# Altium PCB PCB1.PcbDoc
Units mm, origin at the board's own origin, x right, y up, seen from the top; angles counter-clockwise.
Board outline 34.04 x 34.04 mm, 2 copper layers (Top Layer, Bottom Layer); 40 components, 29 nets, 164 pads, 13 vias.
Unrouted connection lines stored in the file: 2.
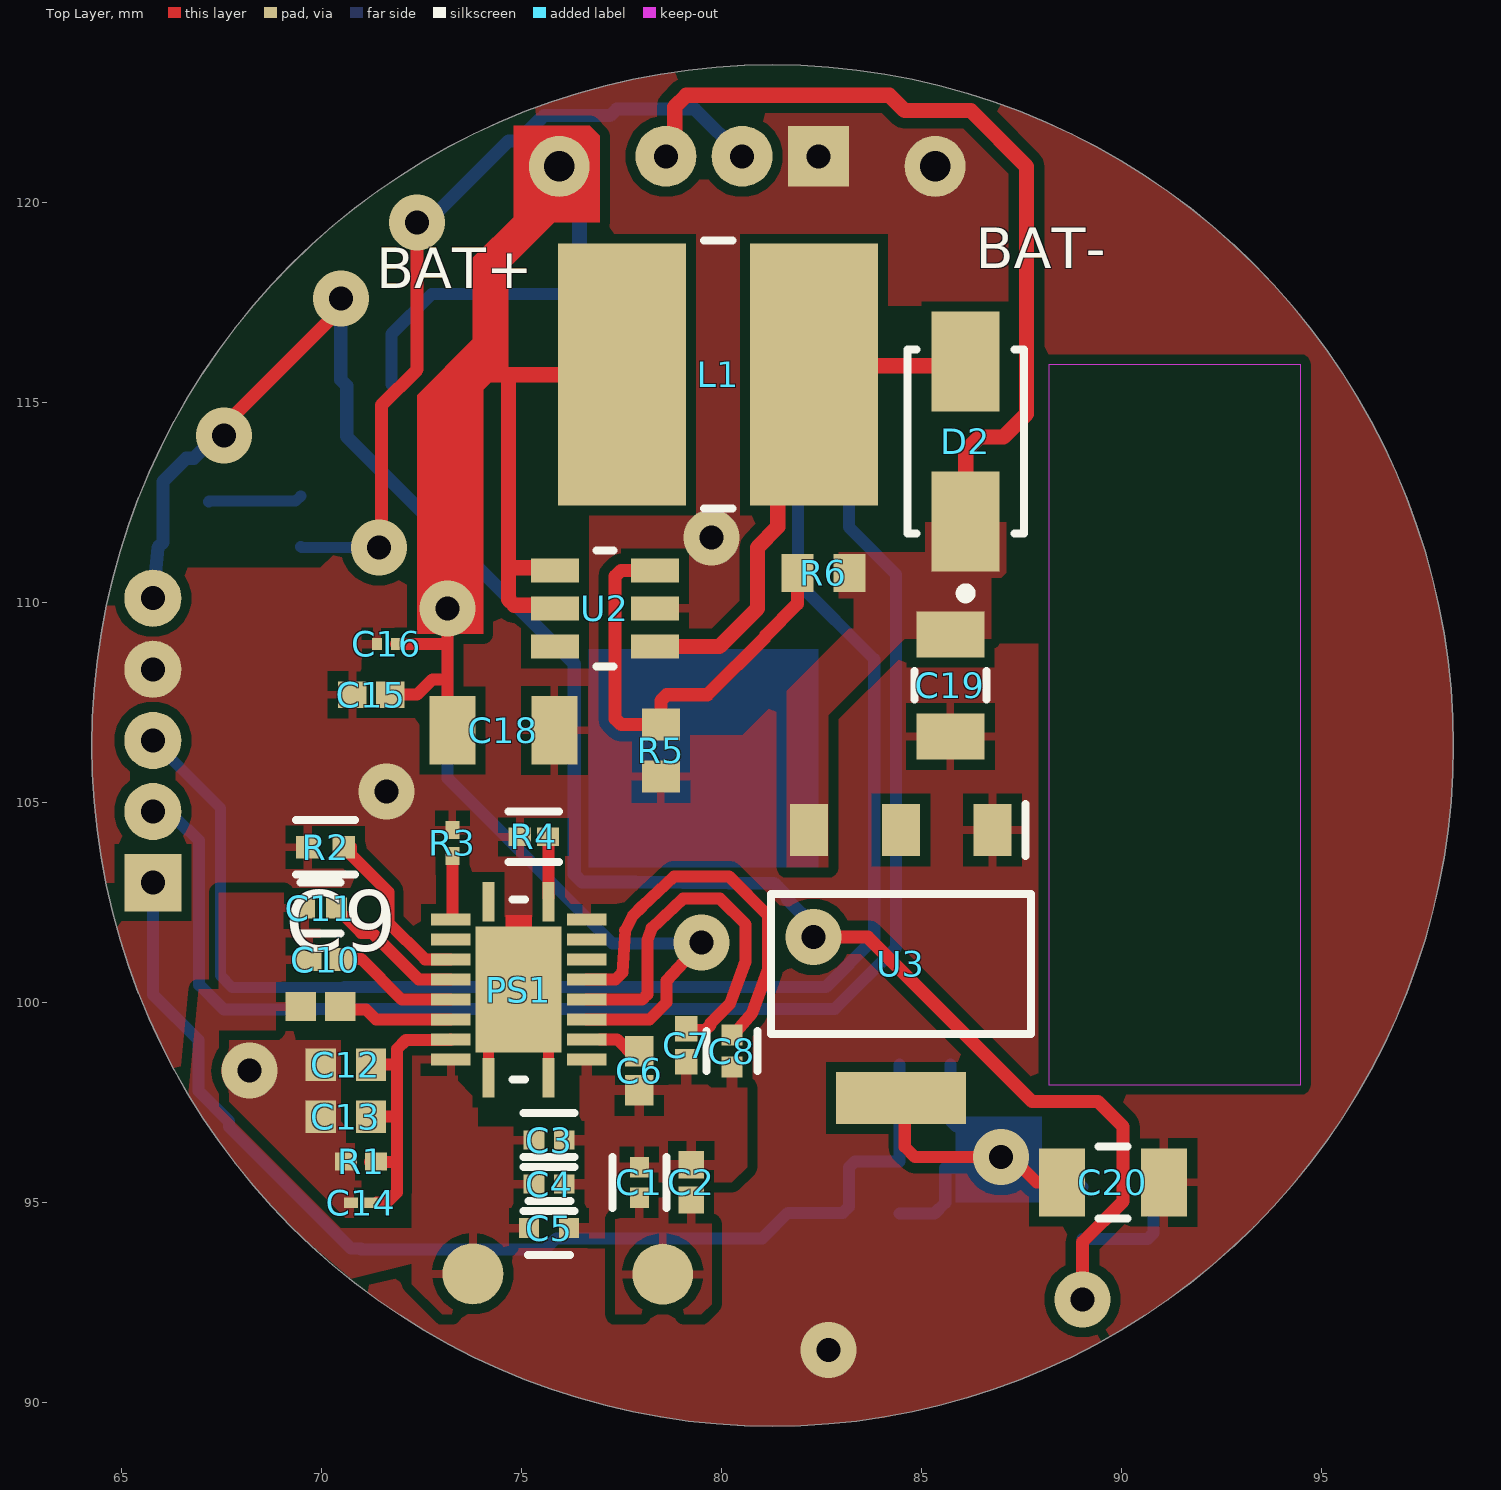
[diagram p0: Top Layer view]
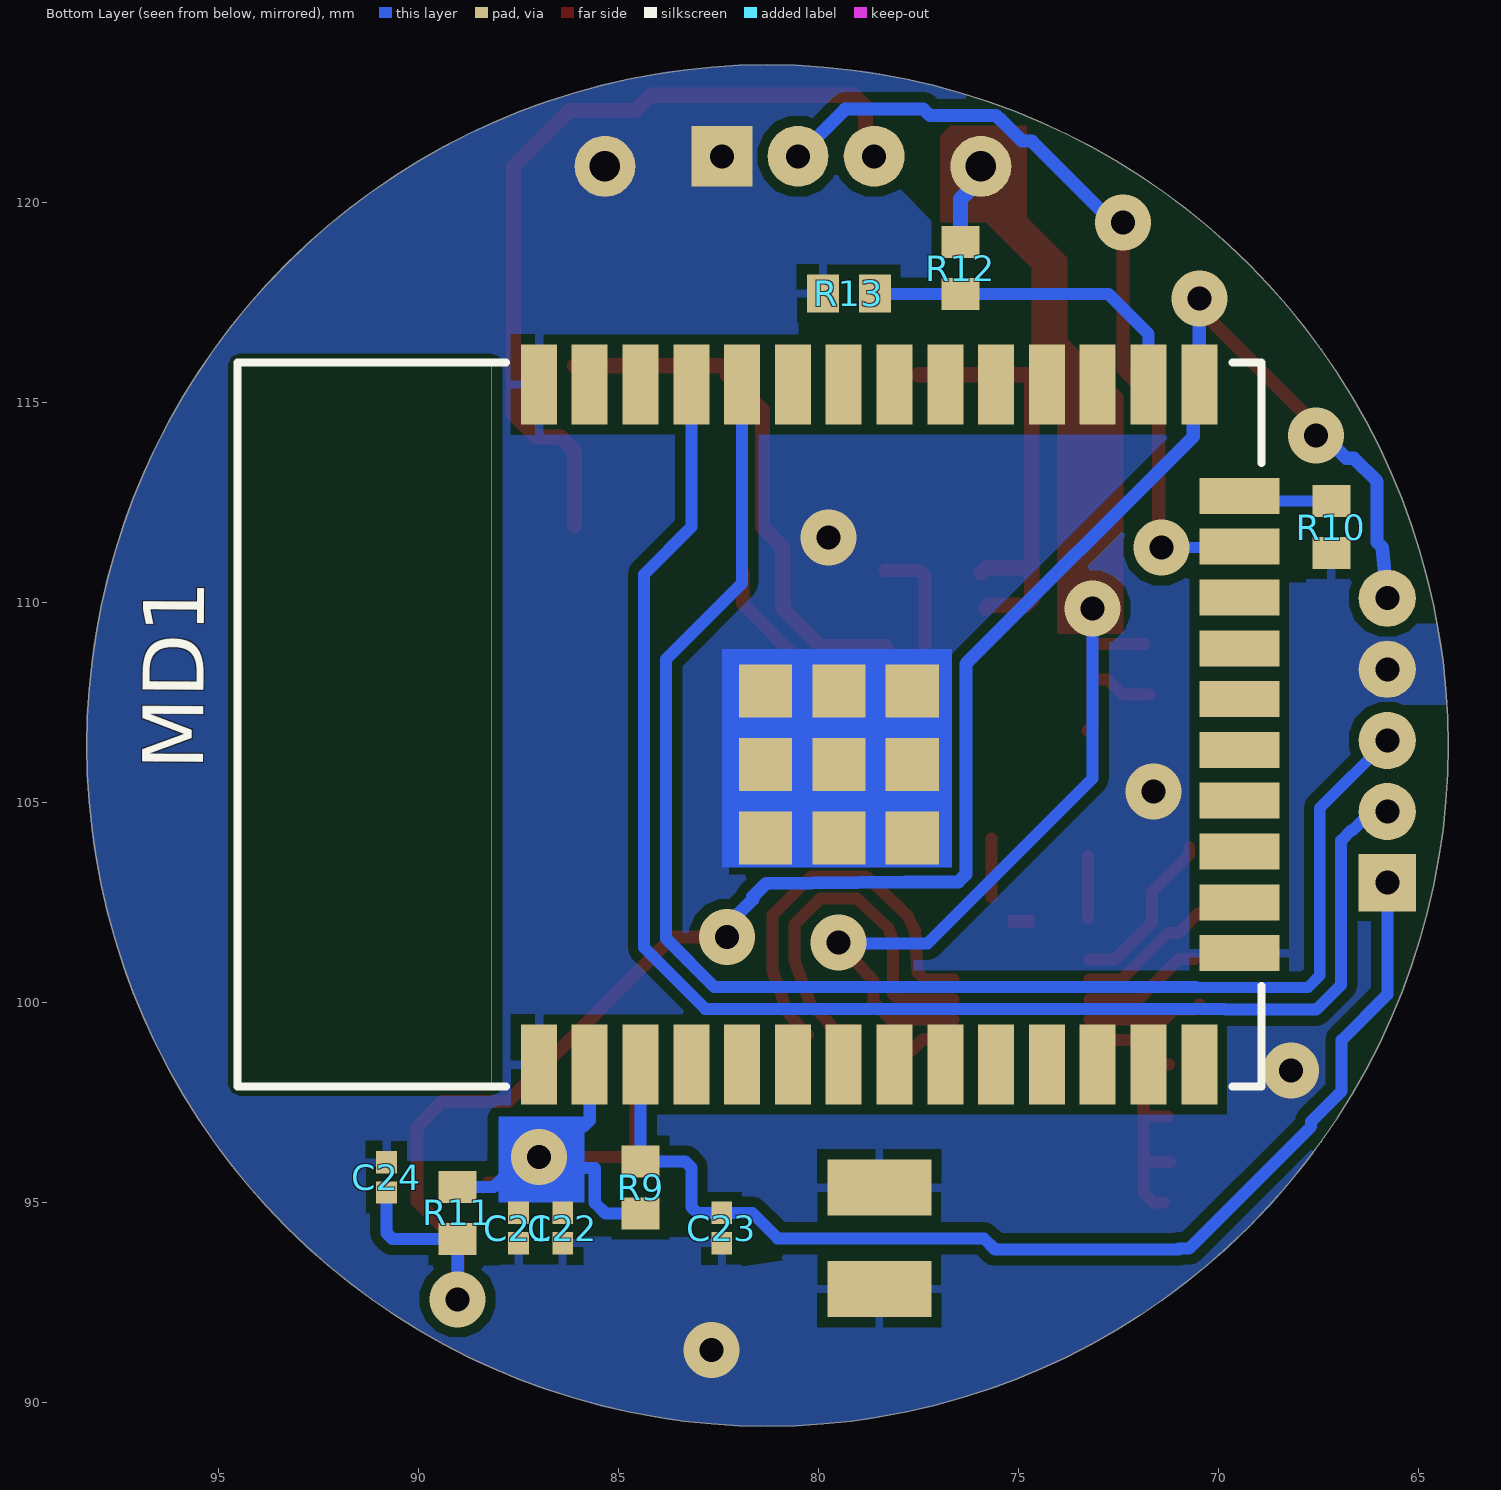
[diagram p1: Bottom Layer view, seen from below]
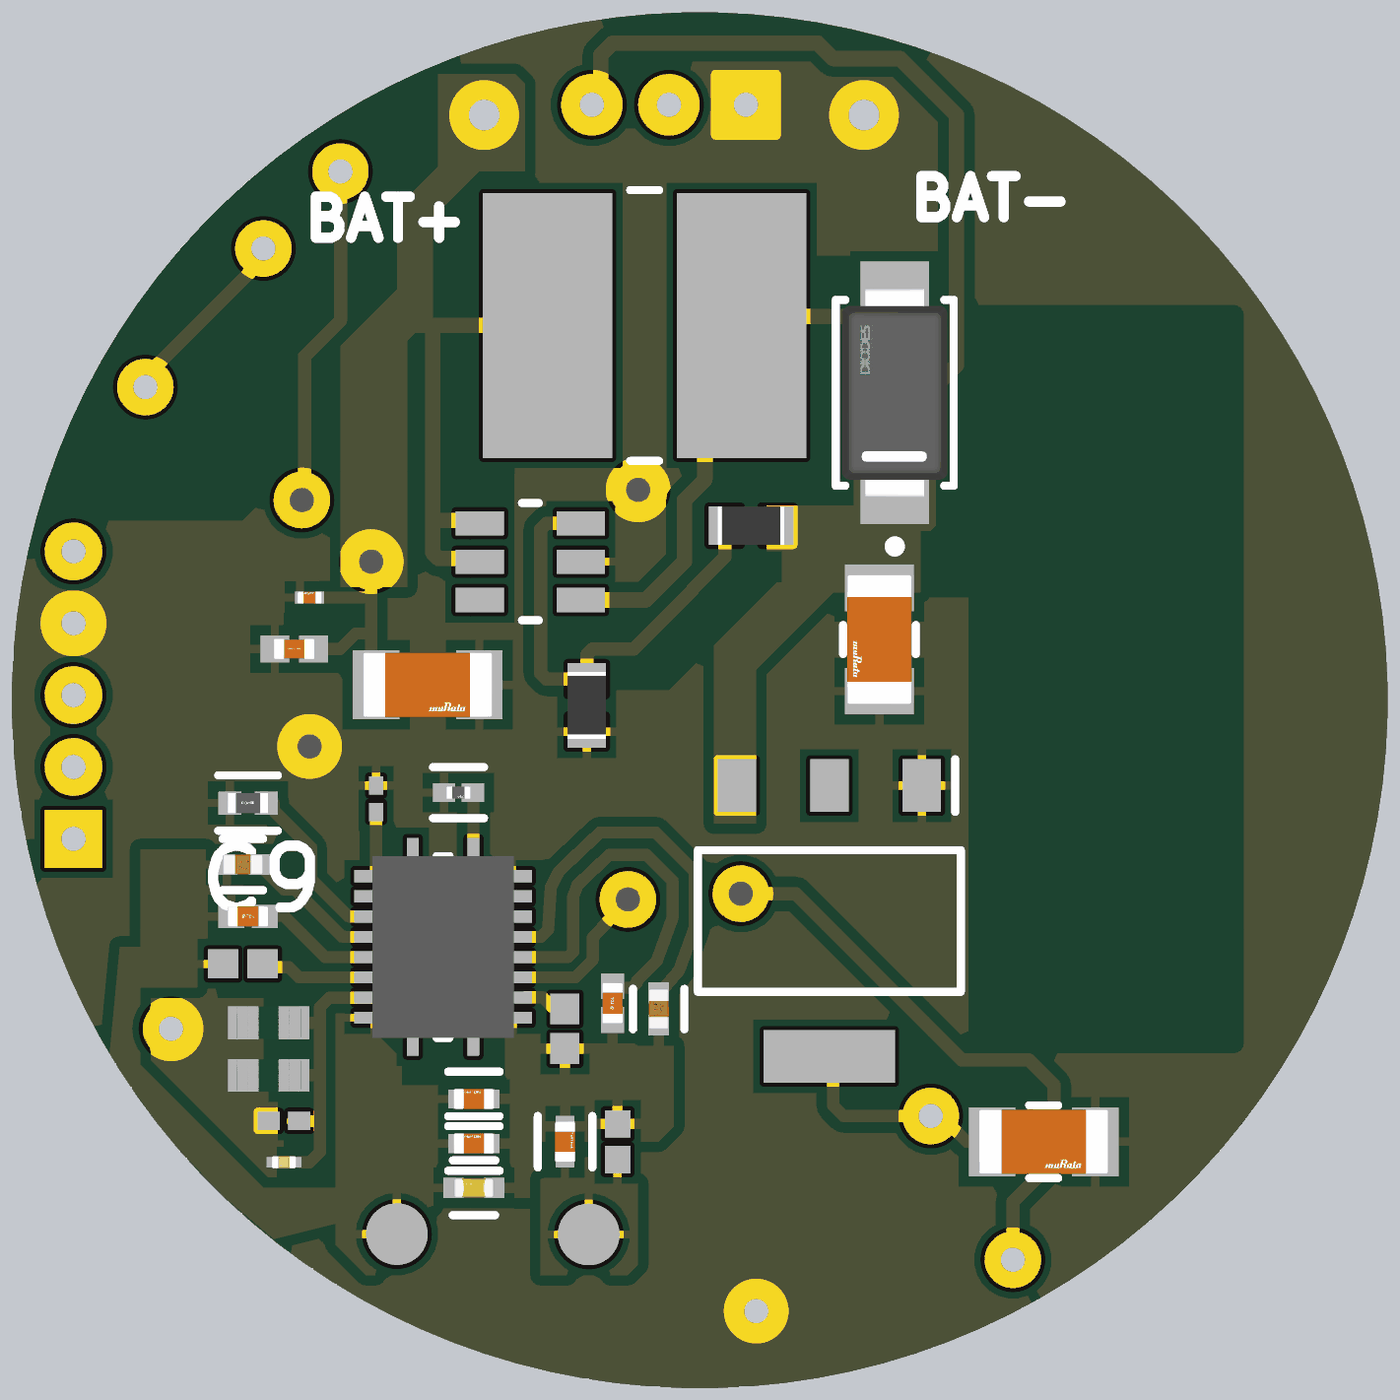
[diagram p2: 3D render of the assembled board from above, using the file's embedded part models]
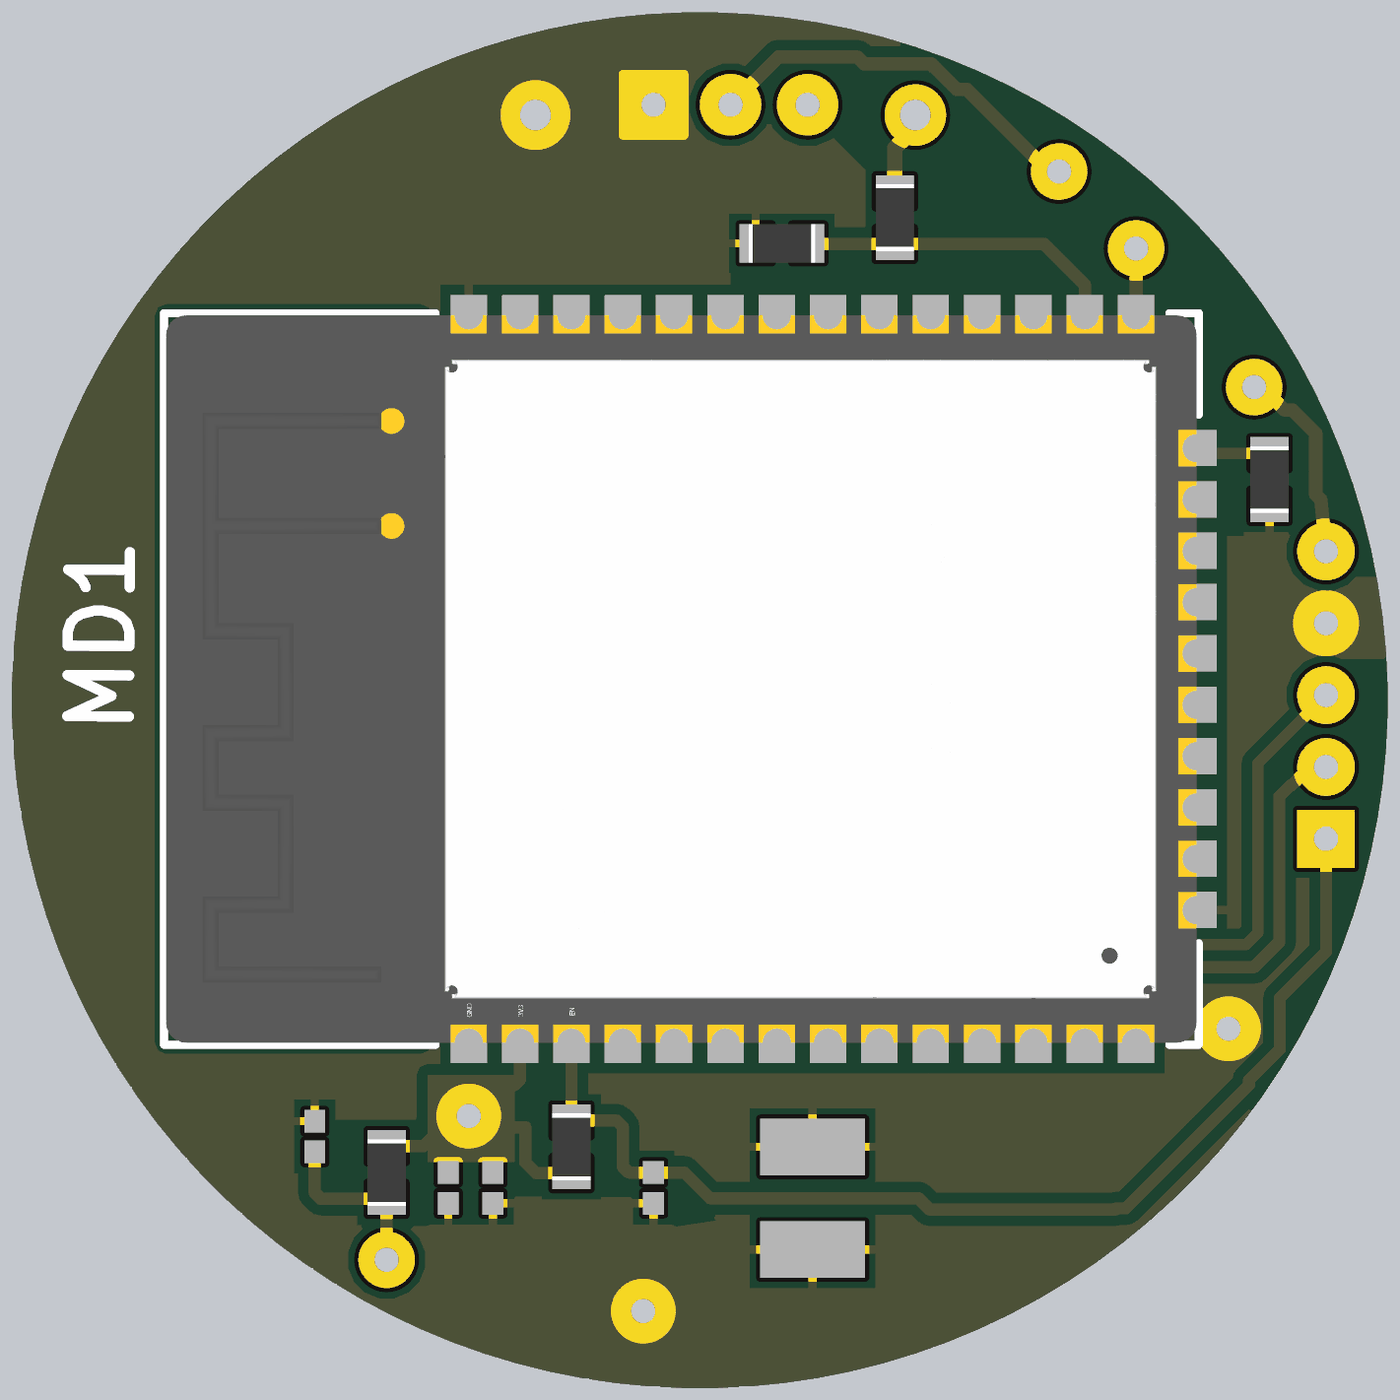
[diagram p3: 3D render of the assembled board from below, using the file's embedded part models]

## Layer stack, top to bottom
Top Solder: solder mask 0.0102, Solder Resist, Dk 3.5
Top Layer: signal copper 0.0356
Dielectric 1: dielectric 0.32, FR-4, Dk 4.8
Bottom Layer: signal copper 0.0356
Bottom Solder: solder mask 0.0102, Solder Resist, Dk 3.5

## Board outline
81.28,89.408 cw(c81.28,106.426) 64.262,106.426 cw(c81.28,106.426) 81.28,123.444 cw(c81.28,106.426) 98.298,106.426 cw(c81.28,106.426)

## Design rules (kind name [scope] priority, off if disabled: settings)
Clearance Clearance_8 [InNamedPolygon('GND_L01_P007')] p1: gap=0.254 ignorepadtopadclearanceinfootprint=FALSE
Clearance Clearance_7 [InNamedPolygon('V_BAT_L01_P006')] p2: gap=0.381 ignorepadtopadclearanceinfootprint=FALSE
Clearance Clearance_6 [InNamedPolygon('GND_L01_P007')] p3: gap=0.381 ignorepadtopadclearanceinfootprint=FALSE
Clearance Clearance_5 [InNamedPolygon('V_BAT_L01_P007')] p4: gap=0.381 ignorepadtopadclearanceinfootprint=FALSE
Clearance Clearance_4 [InNamedPolygon('V_BAT_L01_P006')] p5: gap=0.381 ignorepadtopadclearanceinfootprint=FALSE
Clearance Clearance_3 [All] p6: gap=0.254 ignorepadtopadclearanceinfootprint=TRUE except(0: Arc-Hole Track-Hole SMDPad-Hole THPad-Hole Via-Hole Fill-Hole Poly-Hole Region-Hole Text-Hole)
Clearance Clearance_2 [InNamedPolygon('V_BAT_L01_P006')] p7: gap=0.305 ignorepadtopadclearanceinfootprint=FALSE
Clearance Clearance_1 [InNamedPolygon('GND_BOTTOM')] p8: gap=0.406 ignorepadtopadclearanceinfootprint=FALSE
Clearance [All] p9: gap=0.198 ignorepadtopadclearanceinfootprint=FALSE
ComponentClearance [All] p1: gap=0 collisioncheckmode=3 verticalgap=0 showdistances=FALSE
MinimumSolderMaskSliver [All] p1: minsoldermaskwidth=0.127
PolygonConnect PolygonConnect_26 [All vs IsNamedPolygon('GND_1')] p1: connectstyle=Direct reliefconductorwidth=0.254 reliefentries=4 polygonreliefangle="90 Angle" airgapwidth=0.254
PolygonConnect PolygonConnect_25 [All vs IsNamedPolygon('COIL')] p2: connectstyle=Relief reliefconductorwidth=0.254 reliefentries=4 polygonreliefangle="90 Angle" airgapwidth=0.254
PolygonConnect PolygonConnect_24 [All vs IsNamedPolygon('5V2')] p3: connectstyle=Direct reliefconductorwidth=0.254 reliefentries=4 polygonreliefangle="90 Angle" airgapwidth=0.254
PolygonConnect PolygonConnect_23 [All vs IsNamedPolygon('5V2')] p4: thpad.connectstyle=Direct thpad.reliefconductorwidth=0.254 thpad.reliefentries=4 thpad.polygonreliefangle="90 Angle" thpad.airgapwidth=0.254 smdpad.connectstyle=Relief smdpad.reliefconductorwidth=0.254 smdpad.reliefentries=2 smdpad.polygonreliefangle="90 Angle" smdpad.airgapwidth=0.254 via.connectstyle=Direct via.reliefconductorwidth=0.254 via.reliefentries=4 via.polygonreliefangle="90 Angle" via.airgapwidth=0.254
PolygonConnect PolygonConnect_22 [All vs IsNamedPolygon('GND_1') Or IsNamedPolygon('GND_TOP') Or IsNamedPolygon('GND_BOTTOM')] p5: thpad.connectstyle=Direct thpad.reliefconductorwidth=0.254 thpad.reliefentries=4 thpad.polygonreliefangle="90 Angle" thpad.airgapwidth=0.254 smdpad.connectstyle=Relief smdpad.reliefconductorwidth=0.203 smdpad.reliefentries=4 smdpad.polygonreliefangle="90 Angle" smdpad.airgapwidth=0.254 via.connectstyle=Direct via.reliefconductorwidth=0.254 via.reliefentries=4 via.polygonreliefangle="90 Angle" via.airgapwidth=0.254
PolygonConnect PolygonConnect_21 [All vs IsNamedPolygon('COIL')] p6: thpad.connectstyle=Direct thpad.reliefconductorwidth=0.254 thpad.reliefentries=4 thpad.polygonreliefangle="90 Angle" thpad.airgapwidth=0.254 smdpad.connectstyle=Relief smdpad.reliefconductorwidth=0.203 smdpad.reliefentries=4 smdpad.polygonreliefangle="90 Angle" smdpad.airgapwidth=0.254 via.connectstyle=Direct via.reliefconductorwidth=0.254 via.reliefentries=4 via.polygonreliefangle="90 Angle" via.airgapwidth=0.254
PolygonConnect PolygonConnect_20 [All vs IsNamedPolygon('AC1')] p7: thpad.connectstyle=Direct thpad.reliefconductorwidth=0.254 thpad.reliefentries=4 thpad.polygonreliefangle="90 Angle" thpad.airgapwidth=0.254 smdpad.connectstyle=Relief smdpad.reliefconductorwidth=0.203 smdpad.reliefentries=4 smdpad.polygonreliefangle="90 Angle" smdpad.airgapwidth=0.254 via.connectstyle=Direct via.reliefconductorwidth=0.254 via.reliefentries=4 via.polygonreliefangle="90 Angle" via.airgapwidth=0.254
PolygonConnect PolygonConnect_19 [All vs IsNamedPolygon('AC2')] p8: thpad.connectstyle=Direct thpad.reliefconductorwidth=0.254 thpad.reliefentries=4 thpad.polygonreliefangle="90 Angle" thpad.airgapwidth=0.254 smdpad.connectstyle=Relief smdpad.reliefconductorwidth=0.203 smdpad.reliefentries=4 smdpad.polygonreliefangle="90 Angle" smdpad.airgapwidth=0.254 via.connectstyle=Direct via.reliefconductorwidth=0.254 via.reliefentries=4 via.polygonreliefangle="90 Angle" via.airgapwidth=0.254
PolygonConnect PolygonConnect_18 [All vs IsNamedPolygon('GND_1')] p9: thpad.connectstyle=Direct thpad.reliefconductorwidth=0.254 thpad.reliefentries=4 thpad.polygonreliefangle="90 Angle" thpad.airgapwidth=0.254 smdpad.connectstyle=Relief smdpad.reliefconductorwidth=0.203 smdpad.reliefentries=4 smdpad.polygonreliefangle="90 Angle" smdpad.airgapwidth=0.127 via.connectstyle=Direct via.reliefconductorwidth=0.254 via.reliefentries=4 via.polygonreliefangle="90 Angle" via.airgapwidth=0.254
PolygonConnect PolygonConnect_17 [All vs IsNamedPolygon('AC1.PAD')] p10: connectstyle=Direct reliefconductorwidth=0.254 reliefentries=4 polygonreliefangle="90 Angle" airgapwidth=0.254
PolygonConnect PolygonConnect_16 [All vs IsNamedPolygon('AC1') Or IsNamedPolygon('AC1.PAD') Or IsNamedPolygon('AC2.1') Or IsNamedPolygon('AC2.2')] p11: thpad.connectstyle=Direct thpad.reliefconductorwidth=0.254 thpad.reliefentries=4 thpad.polygonreliefangle="90 Angle" thpad.airgapwidth=0.254 smdpad.connectstyle=Relief smdpad.reliefconductorwidth=0.178 smdpad.reliefentries=2 smdpad.polygonreliefangle="90 Angle" smdpad.airgapwidth=0.254 via.connectstyle=Direct via.reliefconductorwidth=0.254 via.reliefentries=4 via.polygonreliefangle="90 Angle" via.airgapwidth=0.254
PolygonConnect PolygonConnect_15 [All vs IsNamedPolygon('AC1') Or IsNamedPolygon('AC2.1') Or IsNamedPolygon('AC2.2') Or IsNamedPolygon('AC1.PAD')] p12: thpad.connectstyle=Direct thpad.reliefconductorwidth=0.254 thpad.reliefentries=4 thpad.polygonreliefangle="90 Angle" thpad.airgapwidth=0.254 smdpad.connectstyle=Relief smdpad.reliefconductorwidth=0.178 smdpad.reliefentries=4 smdpad.polygonreliefangle="90 Angle" smdpad.airgapwidth=0.254 via.connectstyle=Direct via.reliefconductorwidth=0.254 via.reliefentries=4 via.polygonreliefangle="90 Angle" via.airgapwidth=0.254
PolygonConnect PolygonConnect_14 [All vs IsNamedPolygon('V_BAT_L01_P006')] p13: thpad.connectstyle=Direct thpad.reliefconductorwidth=0.254 thpad.reliefentries=4 thpad.polygonreliefangle="90 Angle" thpad.airgapwidth=0.254 smdpad.connectstyle=Relief smdpad.reliefconductorwidth=0.254 smdpad.reliefentries=4 smdpad.polygonreliefangle="90 Angle" smdpad.airgapwidth=0.254 via.connectstyle=Direct via.reliefconductorwidth=0.254 via.reliefentries=4 via.polygonreliefangle="90 Angle" via.airgapwidth=0.254
PolygonConnect PolygonConnect_13 [All vs IsNamedPolygon('GND_L01_P007')] p14: thpad.connectstyle=Direct thpad.reliefconductorwidth=0.254 thpad.reliefentries=4 thpad.polygonreliefangle="90 Angle" thpad.airgapwidth=0.254 smdpad.connectstyle=Relief smdpad.reliefconductorwidth=0.254 smdpad.reliefentries=4 smdpad.polygonreliefangle="90 Angle" smdpad.airgapwidth=0.254 via.connectstyle=Direct via.reliefconductorwidth=0.254 via.reliefentries=4 via.polygonreliefangle="90 Angle" via.airgapwidth=0.254
PolygonConnect PolygonConnect_12 [All vs IsNamedPolygon('V_BAT_L01_P007')] p15: thpad.connectstyle=Direct thpad.reliefconductorwidth=0.254 thpad.reliefentries=4 thpad.polygonreliefangle="90 Angle" thpad.airgapwidth=0.254 smdpad.connectstyle=Relief smdpad.reliefconductorwidth=0.254 smdpad.reliefentries=4 smdpad.polygonreliefangle="90 Angle" smdpad.airgapwidth=0.254 via.connectstyle=Direct via.reliefconductorwidth=0.254 via.reliefentries=4 via.polygonreliefangle="90 Angle" via.airgapwidth=0.254
PolygonConnect PolygonConnect_11 [All vs IsNamedPolygon('V_BAT_L01_P006')] p16: thpad.connectstyle=Direct thpad.reliefconductorwidth=0.254 thpad.reliefentries=4 thpad.polygonreliefangle="90 Angle" thpad.airgapwidth=0.254 smdpad.connectstyle=Relief smdpad.reliefconductorwidth=0.254 smdpad.reliefentries=4 smdpad.polygonreliefangle="90 Angle" smdpad.airgapwidth=0.254 via.connectstyle=Direct via.reliefconductorwidth=0.254 via.reliefentries=4 via.polygonreliefangle="90 Angle" via.airgapwidth=0.254
PolygonConnect PolygonConnect_10 [All vs IsNamedPolygon('GND_BOTTOM')] p17: thpad.connectstyle=Direct thpad.reliefconductorwidth=0.254 thpad.reliefentries=4 thpad.polygonreliefangle="90 Angle" thpad.airgapwidth=0.254 smdpad.connectstyle=Relief smdpad.reliefconductorwidth=0.305 smdpad.reliefentries=4 smdpad.polygonreliefangle="90 Angle" smdpad.airgapwidth=0.305 via.connectstyle=Direct via.reliefconductorwidth=0.254 via.reliefentries=4 via.polygonreliefangle="90 Angle" via.airgapwidth=0.254
PolygonConnect PolygonConnect_9 [All vs IsNamedPolygon('NONET_L01_P002')] p18: thpad.connectstyle=Direct thpad.reliefconductorwidth=0.254 thpad.reliefentries=4 thpad.polygonreliefangle="90 Angle" thpad.airgapwidth=0.254 smdpad.connectstyle=Relief smdpad.reliefconductorwidth=0.305 smdpad.reliefentries=4 smdpad.polygonreliefangle="90 Angle" smdpad.airgapwidth=0.305 via.connectstyle=Direct via.reliefconductorwidth=0.254 via.reliefentries=4 via.polygonreliefangle="90 Angle" via.airgapwidth=0.254
PolygonConnect PolygonConnect_8 [All vs IsNamedPolygon('V_BAT_L01_P006')] p19: thpad.connectstyle=Direct thpad.reliefconductorwidth=0.254 thpad.reliefentries=4 thpad.polygonreliefangle="90 Angle" thpad.airgapwidth=0.254 smdpad.connectstyle=Relief smdpad.reliefconductorwidth=0.305 smdpad.reliefentries=4 smdpad.polygonreliefangle="90 Angle" smdpad.airgapwidth=0.254 via.connectstyle=Direct via.reliefconductorwidth=0.254 via.reliefentries=4 via.polygonreliefangle="90 Angle" via.airgapwidth=0.254
PolygonConnect PolygonConnect_7 [All vs IsNamedPolygon('V_BAT_L01_P006')] p20: connectstyle=Relief reliefconductorwidth=0.305 reliefentries=4 polygonreliefangle="90 Angle" airgapwidth=0.305
PolygonConnect PolygonConnect_6 [All vs IsNamedPolygon('GND_BOTTOM')] p21: connectstyle=Relief reliefconductorwidth=0.305 reliefentries=4 polygonreliefangle="90 Angle" airgapwidth=0.305
PolygonConnect PolygonConnect_5 [All vs IsNamedPolygon('GND_BOTTOM')] p22: connectstyle=Relief reliefconductorwidth=0.305 reliefentries=4 polygonreliefangle="90 Angle" airgapwidth=0.381
PolygonConnect PolygonConnect_4 [All vs IsNamedPolygon('GND_BOTTOM')] p23: connectstyle=Relief reliefconductorwidth=0.254 reliefentries=4 polygonreliefangle="90 Angle" airgapwidth=0.279
PolygonConnect PolygonConnect_3 [All vs IsNamedPolygon('GND_BOTTOM')] p24: connectstyle=Relief reliefconductorwidth=0.33 reliefentries=4 polygonreliefangle="90 Angle" airgapwidth=0.254
PolygonConnect PolygonConnect_2 [All vs IsNamedPolygon('V_BAT_L01_P006')] p25: connectstyle=Relief reliefconductorwidth=0.381 reliefentries=4 polygonreliefangle="90 Angle" airgapwidth=0.254
PolygonConnect PolygonConnect_1 [All vs IsNamedPolygon('NONET_L01_P002')] p26: connectstyle=Relief reliefconductorwidth=0.33 reliefentries=4 polygonreliefangle="90 Angle" airgapwidth=0.254
PolygonConnect [All] p27: connectstyle=Relief reliefconductorwidth=0.254 reliefentries=4 polygonreliefangle="90 Angle" airgapwidth=0.254
RoutingVias [All] p1: holewidth=0.6 width=1.435 viastyle="Through Hole" minholewidth=0.6 minwidth=1.435 maxholewidth=1.016 maxwidth=1.524
SilkToSilkClearance [All] p1: silktosilkclearance=0.025
SilkToSolderMaskClearance [IsPad] p1: minsilkscreentomaskgap=0.076 clearancetoexposedcopper=FALSE
SolderMaskExpansion [All] p1: expansion=0.102 istentingtop=FALSE
UnConnectedPin [All] p1:
Width [All] p1: maxlimit=0.508 minlimit=0.178 preferedwidth=0.305 minimp=50.000000 maximp=50.000000 favimp=50.000000
26 further rules are at their usual default settings.

## Components (designator, comment, footprint, x,y, rotation, side; value= is the part's Value field where it differs from the comment)
C1 "CL05A474KA5NNNC" FP-CL545-IPC_C 77.948,95.504 r90 top
C2 "04023D104KAT2A" CAPC1005X56X25NL10T15 79.248,95.504 r270 top
C3 "CL05B102JB5NFNC" FP-CL956-IPC_C 75.692,96.562 r180 top
C4 "CL05B102JB5NFNC" FP-CL956-IPC_C 75.692,95.461 r180 top
C5 "CC0402KRX7R7BB472" FP-CC0402-MFG 75.692,94.361 r180 top value="4.7 nF"
C6 "GRM155F51H103ZA01D" CAPC1005X55X25ML05T10 77.946,98.298 r90 top
C7 "C1005X5R1E474K050BB" FP-C1005-050-0_05-IPC_B 79.121,98.933 r90 top
C8 "C0402C223K5RACTU" FP-C0402-BB-MFG 80.264,98.787 r90 top value="22,000 pF"
C9 "GRM155F51H103ZA01D" CAPC1005X55X25ML05T10 69.977,99.901 r0 top
C10 "C1005X5R1E474K050BB" FP-C1005-050-0_05-IPC_B 70.104,101.077 r0 top
C11 "C0402C223K5RACTU" FP-C0402-BB-MFG 69.977,102.362 r0 top value="22,000 pF"
C12 "CL10A106MA8NRNC" FP-CL10-IPC_C 70.612,98.447 r180 top
C13 "CL10A106MA8NRNC" FP-CL10-IPC_C 70.612,97.147 r180 top
C14 "C0603X5R1E104K030BB" FP-C0603-030-0_03-IPC_C 70.993,94.996 r180 top
C15 "EMK105BJ105KV-F" FP-0402-L_1_0_0_05-W_0_5-IPC_A 71.247,107.696 r180 top
C16 "GRM033R60J104KE19J" FP-GRM033-0_03-MFG 71.628,108.966 r180 top
C18 "22uF" FP-GRM31C-0_2-e0_3_0_8-IPC_C 74.549,106.807 r0 top
C19 "22uF" FP-GRM31C-0_2-e0_3_0_8-IPC_C 85.725,107.928 r270 top
C20 "22uF" FP-GRM31C-0_2-e0_3_0_8-IPC_C 89.789,95.504 r0 top
C21 "10uF" CAPC1005X55X30LL05T10 87.503,94.362 r90 bottom
C22 "0.1uF" CAPC1005X55X30LL05T10 86.399,94.361 r90 bottom
C23 "0.1uF" CAPC1005X55X30LL05T10 82.423,94.362 r90 bottom
C24 "0.1uF" CAPC1005X55X30LL05T10 90.805,95.631 r270 bottom
D2 "B340A-13-F" FP-SMA-MFG 86.106,114.032 r90 top
L1 "CDRH6D28NP-3R9NC" INDPM6767X300N 79.917,115.697 r0 top
MD1 "ESP32-WROOM-32" FP-ESP32-WROOM-32-MFG 81.735,106.952 r90 bottom
PS1 "BQ51050BRHLT" RHL(R-PVQFN-N20)_1 74.93,100.322 r90 top
R1 "ERJ-1GNF4122C" RESC0603X26X15ML03T05 70.993,96.021 r0 top
R2 "MCR01MZPF2000" FP-MCR01-IPC_B 70.104,103.883 r0 top
R3 "ERJ-1GEJ391C" RESC0603X26X15NL03T05 73.273,103.99 r270 top
R4 "RMCF0201JT2K40" FP-RMCF0201-IPC_A 75.311,104.14 r0 top
R5 "1k" RESC1609X50X30NL8T20 78.486,106.299 r90 top
R6 "8.2k" RESC1609X50X30NL8T20 82.55,110.744 r0 top
R9 "10K" RESC1609X50X30NL8T20 84.455,95.377 r90 bottom
R10 "3K" RESC1609X50X30NL8T20 67.183,111.887 r270 bottom
R11 "3K" RESC1609X50X30NL8T20 89.027,94.742 r270 bottom
R12 "3k" RESC1609X50X30NL8T20 76.454,118.364 r90 bottom
R13 "8.2k" RESC1609X50X30NL8T20 79.248,117.729 r180 bottom
U2 "MT3608" SOT95P280X145-6N 77.089,109.855 r180 top net-tie
U3 "AMS1117-3.3" SOT229P700X180-4N 84.486,100.965 r270 top

## Footprints (in the part's own frame and the unit in brackets; to place one, negate y for a bottom-side part, rotate by r counter-clockwise, add the part's x,y. Pads: shape width x height; smd on the part's side, far side on the other; paste and mask are expansions set on the pad)
CAPC1005X55X25ML05T10 [mm] "Chip Capacitor, 2-Leads, Body 1.00x0.50mm, IPC Low Density"
  rect 0.76x0.72 smd: 1(-0.49,0) 2(0.49,0)
  body extent -0.53,-0.28 0.53,0.27, height 0.55
CAPC1005X55X30LL05T10 [mm] "Chip Capacitor, 2-Leads, Body 1.00x0.50mm, IPC High Density"
  rect 0.56x0.52 smd: 1(-0.38,0) 2(0.38,0)
  body extent -0.53,-0.28 0.53,0.28, height 0.55
CAPC1005X56X25NL10T15 [mm] "Chip Capacitor, 2-Leads, Body 1.00x0.50mm, IPC Medium Density"
  rect 0.68x0.64 smd: 1(-0.44,0) 2(0.44,0)
  body extent -0.55,-0.3 0.55,0.3, height 0.56
FP-0402-L_1_0_0_05-W_0_5-IPC_A [mm]
  rect 0.715x0.672 smd paste+0 mask+0: 1(-0.479,0) 2(0.479,0)
  body extent -1.04,-0.54 1.04,0.54, height 0.25
FP-C0402-BB-MFG [mm]
  rect 0.52x0.52 smd paste+0 mask+0: 1(-0.4,0) 2(0.4,0)
  silkscreen extent -0.5,-0.64 0.5,0.64, body extent -0.8,-0.4 0.8,0.4, height 0.25
FP-C0603-030-0_03-IPC_C [mm]
  rect 0.356x0.263 smd paste+0 mask+0: 1(-0.253,0) 2(0.253,0)
  body extent -0.53,-0.27 0.53,0.27, height 0.25
FP-C1005-050-0_05-IPC_B [mm]
  rect 0.639x0.572 smd paste+0 mask+0: 1(-0.417,0) 2(0.417,0)
  body extent -0.89,-0.44 0.89,0.44, height 0.25
FP-CC0402-MFG [mm]
  rect 0.5x0.5 smd paste+0 mask+0: 1(-0.5,0) 2(0.5,0)
  silkscreen extent -0.53,-0.68 0.53,0.67, body extent -0.87,-0.48 0.87,0.48, height 0.25
FP-CL10-IPC_C [mm]
  rect 0.758x0.812 smd paste+0 mask+0: 1(-0.627,0) 2(0.627,0)
  body extent -1.11,-0.55 1.11,0.55, height 0.25
FP-CL545-IPC_C [mm]
  rect 0.515x0.472 smd paste+0 mask+0: 1(-0.379,0) 2(0.379,0)
  silkscreen extent -0.64,-0.67 0.64,0.67, body extent -0.74,-0.38 0.74,0.38, height 0.25
FP-CL956-IPC_C [mm]
  rect 0.515x0.472 smd paste+0 mask+0: 1(-0.379,0) 2(0.379,0)
  silkscreen extent -0.64,-0.67 0.64,0.67, body extent -0.74,-0.38 0.74,0.38, height 0.25
FP-ESP32-WROOM-32-MFG [mm]
  rect 2x0.9 smd paste+0 mask+0: 1(-8.5,5.26) 2(-8.5,3.99) 3(-8.5,2.72) 4(-8.5,1.45) 5(-8.5,0.18) 6(-8.5,-1.09) 7(-8.5,-2.36) 8(-8.5,-3.63) 9(-8.5,-4.9) 10(-8.5,-6.17) 11(-8.5,-7.44) 12(-8.5,-8.71) 13(-8.5,-9.98) 14(-8.5,-11.25) 25(8.5,-11.25) 26(8.5,-9.98) 27(8.5,-8.71) 28(8.5,-7.44) 29(8.5,-6.17) 30(8.5,-4.9) 31(8.5,-3.63) 32(8.5,-2.36) 33(8.5,-1.09) 34(8.5,0.18) 35(8.5,1.45) 36(8.5,2.72) 37(8.5,3.99) 38(8.5,5.26)
  rect 0.9x2 smd paste+0 mask+0: 15(-5.715,-12.25) 16(-4.445,-12.25) 17(-3.175,-12.25) 18(-1.905,-12.25) 19(-0.635,-12.25) 20(0.635,-12.25) 21(1.905,-12.25) 22(3.175,-12.25) 23(4.445,-12.25) 24(5.715,-12.25)
  rect 1.33x1.33 smd paste+0 mask+0: 39(-2.835,-4.075) 39(-2.835,-2.24) 39(-2.835,-0.405) 39(-1,-4.075) 39(-1,-2.24) 39(-1,-0.405) 39(0.835,-4.075) 39(0.835,-2.24) 39(0.835,-0.405)
  Keep-Out Layer region: -9,12.75 9,12.75 9,6.45 -9,6.45
  Keep-Out Layer region: -9,12.75 9,12.75 9,6.45 -9,6.45
  silkscreen extent -9.05,-12.8 9.05,12.8, body extent -9,-12.75 9,12.75, height 3.2
FP-GRM31C-0_2-e0_3_0_8-IPC_C [mm]
  rect 1.155x1.706 smd paste+0 mask+0: 1(-1.276,0) 2(1.276,0)
  body extent -1.95,-1 1.95,1, height 0.25
FP-GRM033-0_03-MFG [mm]
  rect 0.25x0.3 smd paste+0 mask+0: 1(-0.237,0) 2(0.237,0)
  body extent -0.46,-0.27 0.46,0.27, height 0.25
FP-MCR01-IPC_B [mm]
  rect 0.566x0.572 smd paste+0 mask+0: 1(-0.453,0) 2(0.453,0)
  silkscreen extent -0.74,-0.69 0.74,0.69, body extent -0.89,-0.44 0.89,0.44, height 0.25
FP-RMCF0201-IPC_A [mm]
  rect 0.554x0.463 smd paste+0 mask+0: 1(-0.354,0) 2(0.354,0)
  silkscreen extent -0.63,-0.63 0.63,0.63, body extent -0.83,-0.43 0.83,0.43, height 0.25
FP-SMA-MFG [mm]
  rect 2.5x1.7 smd paste+0 mask+0: 1(-2,0) 2(2,0)
  silkscreen extent -3.92,-1.46 2.3,1.46, body extent -3.35,-1.56 3.35,1.56, height 0.25
INDPM6767X300N [mm]
  rect 3.2x6.55 smd: 1(-2.4,0) 2(2.4,0)
  silkscreen extent -0.36,-3.35 0.36,3.35
RESC0603X26X15ML03T05 [mm] "Chip Resistor, 2-Leads, Body 0.60x0.30mm, IPC Low Density"
  rect 0.55x0.45 smd: 1(-0.375,0) 2(0.375,0)
  body extent -0.32,-0.16 0.32,0.17, height 0.26
RESC0603X26X15NL03T05 [mm] "Chip Resistor, 2-Leads, Body 0.60x0.30mm, IPC Medium Density"
  rect 0.45x0.35 smd: 1(-0.325,0) 2(0.325,0)
  body extent -0.32,-0.16 0.32,0.17, height 0.26
RESC1609X50X30NL8T20 [mm] "Chip Resistor, 2-Leads, Body 1.65x0.95mm, IPC Medium Density"
  rect 0.8x0.95 smd: 1(-0.65,0) 2(0.65,0)
  body extent -0.82,-0.48 0.82,0.48, height 0.5
RHL(R-PVQFN-N20)_1 [mm]
  rect 0.99x0.3 smd: 1(-2.2,-0.75) 10(2.2,-0.75) 11(2.2,0.75) 20(-2.2,0.75)
  rect 0.3x0.99 smd: 2(-1.75,-1.7) 3(-1.25,-1.7) 4(-0.75,-1.7) 5(-0.25,-1.7) 6(0.25,-1.7) 7(0.75,-1.7) 8(1.25,-1.7) 9(1.75,-1.7) 12(1.75,1.7) 13(1.25,1.7) 14(0.75,1.7) 15(0.25,1.7) 16(-0.25,1.7) 17(-0.75,1.7) 18(-1.25,1.7) 19(-1.75,1.7)
  rect 3.15x2.15 smd: 21(0,0)
  silkscreen extent -2.25,-0.16 2.25,0.16, body extent -2.25,-1.75 2.25,1.75, height 1
SOT95P280X145-6N [mm]
  rect 1.2x0.6 smd: 1(-1.25,0.95) 2(-1.25,0) 3(-1.25,-0.95) 4(1.25,-0.95) 5(1.25,0) 6(1.25,0.95)
  silkscreen extent -0.21,-1.45 0.21,1.45
SOT229P700X180-4N [mm]
  rect 1.3x0.95 smd: 1(-3.35,2.29) 2(-3.35,0) 3(-3.35,-2.29)
  rect 1.3x3.25 smd mask+0.102: 4(3.35,0)
  silkscreen extent -4,-3.25 1.75,3.25

## Part data
C1: library part CMP-13271-002157-1, "Cap Ceramic 470nF 25V X5R ±10% SMD 0402 +85°C Paper T/R", Capacitance=470nF, Case Code (Imperial)=0402, Case Code (Metric)=1005, Max Operating Temperature=85°C, Min Operating Temperature=-55°C, Package Quantity=1, Tolerance=10%, Voltage Rating=25V, Case/Package=0402, Lead Free="Lead Free", Length=0.039inch, Material=Ceramic, Mount="Surface Mount", Packaging="Tape and Reel", Thickness=0.022inch, Voltage Rating (DC)=25V, Width=0.02inch
C2: library part CMP-1034-02072-2, Manufacturer="AVX Interconnect / Elco", Part Number=04023D104KAT2A
C3 C4: library part CMP-13271-003618-1, "Cap Ceramic 1nF 50V X7R ±5% SMD 0402 +125°C Paper T/R", Capacitance=1nF, Case Code (Imperial)=0402, Case Code (Metric)=1005, Max Operating Temperature=125°C, Min Operating Temperature=-55°C, Package Quantity=1, Tolerance=5%, Voltage Rating=50V, Case/Package=0402, Length=0.039inch, Mount="Surface Mount", Packaging="Tape and Reel", Thickness=0.022inch, Width=0.02inch
C5: library part CMP-1034-01810-2, "CAP CER 4700PF 16V X7R 0402", Capacitance="4.7 nF", Manufacturer=YAGEO, Package=CC0402, Temperature="-55°C to +125°C", Temperature Characteristic=X7R, Temperature Coefficient=30ppm/°C, Temperature Range High=+125°C, Temperature Range Low=-55°C, Tolerance=0.1, Voltage Rating="16 V", Automotive=No, Automotive Grade=NA, Category=Cap, ComponentLink2Description=Datasheet, ComponentLink2URL=http://www.yageo.com/documents/recent/UPY-GP_NP0_16V-to-50V_16.pdf, Device Class L1="Passive Components", Device Class L2=Capacitors, Device Class L3="Ceramic Capacitors", Digikey Description="CAP CER 4700PF 16V X7R 0402", Footprint Url=http://www.yageo.com/exep/pages/download/literatures/UPY-C_GEN_24.pdf, Height=0.55mm, Ipc Land Pattern Name=CAPC10050X50, Lead Free=Yes, Manufacturer Part Number=CC0402KRX7R7BB472, Material=Ceramic, Mouser Description="YAGEO (PHYCOMP) - CC0402KRX7R7BB472 - CAP, MLCC, X7R, 4.7NF, 16V, 0402", Octopart=https://octopart.com/cc0402krx7r7bb472-yageo-44648962, RoHS=TRUE
C6: library part CMP-2008-04529-1, "10n", Manufacturer=Murata, Part Number=GRM155F51H103ZA01D
C7 C10: library part CMP-2000-06003-2, "Multilayer Ceramic Capacitors 470nF ±10% 25V X5R SMD 0402", Capacitance=470nF, Case Code (Imperial)=0402, Case Code (Metric)=1005, Dielectric=X5R, Dielectric Material=Ceramic, Max Operating Temperature=85°C, Min Operating Temperature=-55°C, Package Quantity=10000, Tolerance=10%, Voltage=25V, Case/Package=0402, Construction=Flat, Depth=0.5mm, Dissipation Factor=10%, Height=0.5mm, Lead Free="Lead Free", Length=1mm, Mount="Surface Mount", Packaging="Tape and Reel", Radiation Hardening=No, REACH SVHC="No SVHC", Resistor Type=Ceramic, RoHS Compliant=Yes, Series=C, Termination=SMD/SMT, Thickness=500um, Voltage Rating=25V, Voltage Rating (DC)=25V, Weight=2.3E-05oz, Width=0.02inch
C8 C11: library part CMP-2008-03151-2, "CAP CER 0.022UF 50V 10% X7R 0402", Capacitance="22,000 pF", Manufacturer=Kemet, Package=C0402-BB, Temperature="-55°C to +125°C", Temperature Characteristic=X7R, Temperature Coefficient=15%, Temperature Range High=+125°C, Temperature Range Low=-55°C, Tolerance=0.1, Voltage Rating="50 V", Automotive=No, Category=Cap, ComponentLink2Description=Datasheet, ComponentLink2URL=https://content.kemet.com/datasheets/KEM_C1002_X7R_SMD.pdf, Device Class L1="Passive Components", Device Class L2=Capacitors, Device Class L3="Ceramic Capacitors", Digikey Description="CAP CER 0.022UF 50V 10% X7R 0402", Height=0.55mm, Ipc Land Pattern Name=CAPC10050X50, Lead Free=Yes, Manufacturer Part Number=C0402C223K5RACTU, Material=Ceramic, Mouser Description="0402 C 22nF Ceramic Multilayer Capacitor, 50 V, +125degC, X7R Dielectric, +/-10%", Octopart=https://octopart.com/c0402c223k5ractu-kemet-99241, RoHS=TRUE
C9: library part CMP-2008-04529-1, Manufacturer=Murata, Part Number=GRM155F51H103ZA01D
C12 C13: library part CMP-13271-004224-1, "Cap Ceramic 10uF 25V X5R ±20% Pad SMD 0603 +85°C T/R", Capacitance=10uF, Case Code (Imperial)=0603, Case Code (Metric)=1608, Dielectric=X5R, Max Operating Temperature=85°C, Min Operating Temperature=-55°C, Package Quantity=1, Tolerance=20%, Voltage Rating=25V, Case/Package=0603, Contact Plating=Tin, Lead Free="Lead Free", Length=0.063inch, Mount="Surface Mount", Packaging="Tape and Reel", Termination=Wraparound, Thickness=0.035inch, Width=0.031inch
C14: library part CMP-08246-005139-1, "Multilayer Ceramic Capacitors 100nF ±10% 25V X5R SMD 0201", Capacitance=100nF, Case Code (Imperial)=0201, Case Code (Metric)=0603, Dielectric=X5R, Dielectric Material=Ceramic, Max Operating Temperature=85°C, Min Operating Temperature=-55°C, Package Quantity=15000, Tolerance=10%, Voltage Rating=25V, Case/Package=0201, Depth=0.3mm, Height=0.3mm, Lead Free="Lead Free", Length=0.6mm, Mount="Surface Mount", Packaging="Tape and Reel", REACH SVHC="No SVHC", RoHS Compliant=Yes, Series=C, Termination=SMD/SMT, Thickness=0.013inch, Voltage Rating (DC)=25V, Weight=6E-06oz, Width=0.012inch
C15: library part CMP-14477-000104-2, "1u", Capacitance=1uF, Case Code (Imperial)=0402, Case Code (Metric)=1005, Dielectric=X5R, Max Operating Temperature=85°C, Min Operating Temperature=-55°C, Package Quantity=1, Tolerance=10%, Voltage Rating=16V, Case/Package=0402, Construction=Flat, Depth=0.5mm, Halogen Free="Halogen Free", Height=0.5mm, Length=1mm, Mount="Surface Mount", Number of Pins=2, Packaging="Tape and Reel", Radiation Hardening=No, RoHS Compliant=Yes, Series=M, Termination=SMD/SMT, Thickness=0.022inch, Voltage Rating (DC)=16V, Width=0.02inch
C16: library part CMP-2010-01258-2, "Chip Multilayer Ceramic Capacitors for General Purpose, 0201, 0.10uF, X5R, 15%, 10%, 6.3V", Capacitance=100nF, Case Code (Imperial)=0201, Case Code (Metric)=0603, Dielectric=X5R, Max Operating Temperature=85°C, Min Operating Temperature=-55°C, Package Quantity=50000, Tolerance=10%, Voltage Rating=6.3V, Case/Package=0201, Depth=0.3mm, Height=0.3mm, Lead Free="Lead Free", Length=0.6mm, Mount="Surface Mount", Packaging="Tape and Reel", Radiation Hardening=No, Termination=SMD/SMT, Thickness=0.013inch, Voltage Rating (DC)=6.3V, Width=0.012inch
C18 C19 C20: library part CMP-06035-036836-1, "Chip Multilayer Ceramic Capacitors for General Purpose, 1206, 22uF, X7R, 15%, 10%, 10V", Case Code (Imperial)=1206, Case Code (Metric)=3216, Dielectric=X7R, Max Operating Temperature=125°C, Min Operating Temperature=-55°C, Package Quantity=6000, Resistor Type=Ceramic, Tolerance=10%, Voltage Rating=10V, Capacitance=22uF, Case/Package=1206, Height=1.6mm, Length=0.126inch, Mount="Surface Mount", Packaging="Tape and Reel", Termination=SMD/SMT, Thickness=0.071inch, Voltage Rating (DC)=10V, Weight=0.001411oz, Width=1.6mm
C21 C22 C23 C24: library part CMP-0001-00074-2, Manufacturer=Kemet, Part Number=C0402C104K4RACTU
D2: library part CMP-1667-00003-3, "DIODE SCHOTTKY 40V 3A SMA", Average Rectified Current=3A, Capacitance=250pF, Case/Package=SMA, Forward Voltage=500mV, Max Forward Surge Current (Ifsm)=80A, Max Operating Temperature=125°C, Max Repetitive Reverse Voltage (Vrrm)=40V, Max Reverse Current=500uA, Min Operating Temperature=-55°C, Package Quantity=5000, Contact Plating=Tin, Current=3A, Current Rating=3A, Element Configuration=Single, Forward Current=3A, Height=2.3mm, Lead Free="Lead Free", Length=4.6mm, Max Reverse Voltage (DC)=40V, Mount="Surface Mount", Number of Pins=2, Output Current=3A, Packaging="Tape and Reel", Peak Non-Repetitive Surge Current=80A, Polarity=Standard, Radiation Hardening=No, REACH SVHC="No SVHC", RoHS Compliant=Yes, Series=-, Termination=SMD/SMT, Voltage=40V, Voltage Rating (DC)=40V, Weight=0.002258oz, Width=2.92mm
L1: "Inductor Power Shielded Drum Core 3.9uH 30% 100KHz Ferrite 2.6A 27mOhm DCR T/R", Manufacturer_Name=Sumida, Mouser Part Number=851-CDRH6D28NP-3R9NC, Arrow Part Number=CDRH6D28NP-3R9NC, Arrow Price/Stock=https://www.arrow.com/en/products/cdrh6d28np-3r9nc/sumida?region=nac, Datasheet Link=https://products.sumida.com/products/pdf/CDRH6D28.pdf, Geometry.Height=3mm, Manufacturer_Part_Number=CDRH6D28NP-3R9NC, Mouser Price/Stock=https://www.mouser.co.uk/ProductDetail/Sumida/CDRH6D28NP-3R9NC?qs=zomZ4Ds8yq0PwwlLtueMZw%3D%3D
MD1: library part CMP-194065-000008-1, "RX TXRX MOD WIFI SURFACE MOUNT", Case/Package=SMD/SMT, Frequency=2.5GHz, Max Operating Temperature=85°C, Min Operating Temperature=-40°C, Operating Supply Voltage=3.6V, Package Quantity=550, Data Rate=150Mbps, Mount="Surface Mount", Packaging="Cut Tape", Sensitivity=-98dBm, Weight=0.088185oz
PS1: "Power Supply", Manufacturer_Name="Texas Instruments", Mouser Part Number=595-BQ51050BRHLT, Arrow Part Number=BQ51050BRHLT, Arrow Price/Stock=https://www.arrow.com/en/products/bq51050brhlt/texas-instruments?region=nac, Datasheet Link=http://www.ti.com/lit/ds/symlink/bq51050b.pdf, Manufacturer_Part_Number=BQ51050BRHLT, Mouser Price/Stock=https://www.mouser.co.uk/ProductDetail/Texas-Instruments/BQ51050BRHLT?qs=E2%2FxqS9xjzqwEGLvRoYWQw%3D%3D
R1: library part CMP-2004-03348-1, Manufacturer=Panasonic, Part Number=ERJ-1GNF4122C
R2: library part CMP-08839-015346-1, "Thick Film Chip Resistor, 0402, 200Ω, 1%, 100ppm/°C, 0.063W, 50V", Case/Package=Molded, Max Operating Temperature=155°C, Min Operating Temperature=-55°C, Power Rating=63mW, Resistance=200R, Resistor Type="Thick Film", Temperature Coefficient=100ppm/°C, Tolerance=1%, Voltage Rating (DC)=50V, Construction=Rectangular, Contact Plating=Tin, Depth=0.5mm, Lead Free="Lead Free", Length=1mm, Military Standard=Not, Mount="Surface Mount", Packaging="Tape and Reel", RoHS Compliant=Yes, Size Code=0402
R3: library part CMP-2004-03181-1, Manufacturer=Panasonic, Part Number=ERJ-1GEJ391C
R4: library part CMP-26527-004736-1, "2.4kΩ ±5% 0.05W 0201 Thick Film Chip Resistor AEC-Q200 compliant", Case Code (Imperial)=0201, Case Code (Metric)=0603, Max Operating Temperature=125°C, Max Power Dissipation=50mW, Min Operating Temperature=-55°C, Resistance=2.4kR, Resistor Type="Thick Film", Temperature Coefficient=200ppm/°C, Tolerance=5%, Case/Package=0201, Contact Plating=Tin, Height=0.009inch, Length=0.024inch, Mount="Surface Mount", Number of Terminations=2, Packaging="Tape and Reel", Radiation Hardening=No, RoHS Compliant=Yes, Series=RMCF, Width=0.012inch
R5 R6 R9 R10 R11 R12 R13: library part CMP-2000-03816-5, "Chip Resistor, 0 Ohm, Jumper, 100 mW, -55 to 155 degC, 0603 (1608 Metric), RoHS, Tape and Reel", Manufacturer="Vishay Semiconductor", Max Operating Temperature="155 degC", Min Operating Temperature="-55 degC", Package Quantity=5000, Voltage Rating="75 V", ComponentLink1Description="Manufacturer URL", ComponentLink1URL=http://www.vishay.com/, ComponentLink2Description=Datasheet, ComponentLink2URL=http://www.vishay.com/docs/20035/dcrcwe3.pdf, DatasheetVersion=06/2012, Height="0.45 mm", Length="1.55 mm", Mount="Surface Mount", Mounting Technology="Surface Mount", PackageDescription="2-Pin Surface Mount Device, Body 1.575 x 0.85 mm", PackageReference=0603, Packaging="Tape and Reel", Pins=2, REACH SVHC=Unknown, RoHSCompliant=true
U2: "High Efficiency 1.2MHz 2A Step Up Converter", Manufacturer_Name=Aerosemi, Datasheet Link=https://www.olimex.com/Products/Breadboarding/BB-PWR-3608/resources/MT3608.pdf, Geometry.Height=1.45mm, Manufacturer_Part_Number=MT3608
U3: "1A LOW DROPOUT VOLTAGE REGULATOR, SOT-223", Manufacturer_Name="Advanced Monolithic Systems", Datasheet Link=http://www.advanced-monolithic.com/pdf/ds1117.pdf, Geometry.Height=1.8mm, Manufacturer_Part_Number=AMS1117-3.3

## Free pads (board coordinates)
  round 1.524 hole 0.6: 14(78.613,121.158) 14(80.518,121.158)
  rect 1.524x1.524 hole 0.6: 14(82.423,121.158)
  rect 1.43x1.43 hole 0.6: 18(65.786,102.997)
  round 1.43 hole 0.6: 19(65.786,104.775) 20(65.786,106.553) 21(65.786,108.331) 21(65.786,110.109)
  round 1.524 smd: 22(78.533,93.209) 23(73.787,93.218)
  round 1.524 hole 0.762: 25(75.946,120.904) 26(85.344,120.904)
  rect 2.6x1.4 smd far side: 27(78.486,92.837) 28(78.486,95.377)

## Via types
v1: diameter 1.4, hole 0.6, Top Layer to Bottom Layer, 13 vias

## Nets (pads, with @x,y where several pads share a name; then routed paths per layer and width w, separated by ;. In a path a pad name is that pad's centre, name@x,y a point inside that pad or via, vN(x,y) a via of type N, cw(c..) or ccw(c..) an arc to the next point about the centre after c; other vN are vias at no path point)
3V3: C20.1 C21.2 C22.2 MD1.2 R9.1 R11.1 U3.4 | length 12.9
  Top Layer w0.305: U3.4@84.582,97.409 84.582,96.393 84.836,96.139 v1(86.995,96.139) 87.249,96.139 87.884,95.504 88.265,95.504 C20.1@88.392,95.377
  Bottom Layer w0.305: R9.1 85.329,94.727 85.598,94.996 85.598,95.863 v1@86.465,95.863 ; MD1.2 85.725,97.05 85.874,96.901 86.36,96.901 86.487,96.774 86.487,96.52 86.868,96.139 v1(86.995,96.139) ; 86.36,95.758 86.399,95.719 ; 87.757,95.758 88.123,95.392 R11.1
5V2: C19.1 D2.1 pad.14@78.613,121.158 R6.2 U3.3 | length 20.8
  Top Layer w0.381: pad.14@78.613,121.285 78.832,121.504 78.832,122.393 79.121,122.682 84.201,122.682 84.582,122.301 86.233,122.301 87.63,120.904 87.63,114.714 87.054,114.138 86.452,114.138 86.106,113.792 D2.1@86.106,111.919
AC1: C1.2 C2.1 C3.1 C4.1 C5.1 C6.1 C7.1 C8.1 PS1.2
AC2: C3.2 C4.2 C5.2 C9.1 C10.1 C11.1 pad.23 PS1.19
BAT: C15.1 C16.1 C18.1 L1.1 pad.25 PS1.4 R12.2 U2.4 U2.5 | length 36.2
  Top Layer w0.3: C15.1 72.39,107.696 72.771,108.077 73.152,108.077 ; C16.1 73.152,108.966 ; v1(73.152,109.855) 73.152,108.966 ; C18.1@73.279,106.807 73.152,106.934 73.152,108.077 ; PS1.4 78.199,99.572 78.632,100.006 78.632,100.447 78.632,100.548 v1(79.502,101.498) ; 73.152,108.077 73.152,108.966
  Top Layer w0.381: 74.041,115.697 74.676,115.697 ; U2.5@75.819,109.855 75.74,109.934 74.821,109.934 74.676,110.078 74.676,110.871 ; U2.4@75.946,110.744 75.819,110.871 74.676,110.871 ; L1.1 74.676,115.697 ; 74.676,110.871 74.676,115.697
  Bottom Layer w0.3: v1(73.152,109.855) 73.152,105.604 77.283,101.473 79.477,101.473 v1(79.502,101.498)
  Bottom Layer w0.381: pad.25 75.946,120.595 76.454,120.087 R12.2 R12.2@76.454,118.872
BOOT1: C6.2 PS1.3 | length 1.2
  Top Layer w0.3: PS1.3@76.962,99.079 77.392,99.079 77.655,98.817 C6.2@78.021,98.817
BOOT2: C9.2 PS1.17 | length 2.9
  Top Layer w0.3: C9.2@70.485,99.949 70.612,99.822 71.12,99.822 71.37,99.572 PS1.17
CLAMP1: C7.2 PS1.5 | length 9.6
  Top Layer w0.3: PS1.5 78.016,100.072 78.15,100.205 78.15,101.567 78.256,101.859 79.045,102.602 79.959,102.602 80.606,101.955 80.606,101.041 80.216,99.973 79.727,99.485 79.727,99.441 79.6,99.314 C7.2@79.121,99.314
CLAMP2: C10.2 PS1.16 | length 3
  Top Layer w0.3: C10.2@70.612,101.092 70.993,101.092 72.013,100.072 PS1.16
COIL_1: C1.1 C2.2 pad.22
COMM1: C8.2 PS1.6 | length 9.9
  Top Layer w0.3: PS1.6 77.346,100.572 77.529,100.755 77.596,101.797 77.785,102.172 78.027,102.413 78.815,103.156 80.189,103.156 81.16,102.185 81.16,100.811 80.77,99.744 80.295,99.187 C8.2
COMM2: C11.2 PS1.15 | length 3.4
  Top Layer w0.3: C11.2@70.485,102.235 70.491,102.229 70.51,102.229 70.995,101.744 71.264,101.744 72.427,100.58 72.46,100.58 72.468,100.572 PS1.15
FOD: PS1.14 R2.2 | length 4.2
  Top Layer w0.3: R2.2@70.739,103.886 70.739,103.698 71.672,102.765 71.672,102 72.593,101.079 73.223,101.079 PS1.14
GND: C12.2 C13.2 C14.2 C15.2 C16.2 C18.2 C19.2 C20.2 C21.1 C22.1 C23.1 C24.1 MD1.1 MD1.15 MD1.38 MD1.39 pad.14@82.423,121.158 pad.21@65.786,108.331 pad.26 pad.27 pad.28 PS1.1 PS1.9 PS1.20 PS1.21 R1.1 R2.1 R3.1 R4.1 R5.1 R10.2 R13.1 U2.2 U3.1 | length 1.7
  Top Layer w0.279: PS1.21@74.168,98.806 74.18,98.794 PS1.20@74.18,98.003 ; PS1.1@75.68,98.003 75.68,98.921 PS1.21@75.692,98.933
  other v1: 82.677,91.313 68.199,98.298 71.628,105.283 79.756,111.633
ILIM: PS1.12 R3.2 | length 1.6
  Top Layer w0.203: PS1.12@73.273,102.114 PS1.12@73.279,102.108
  Top Layer w0.3: PS1.12@73.273,102.114 R3.2
NetC23_2: C23.2 MD1.3 pad.18 R9.2 | length 28.8
  Bottom Layer w0.3: pad.18 65.786,100.203 66.929,99.06 66.929,97.79 67.691,97.028 67.691,96.901 70.739,93.853 70.993,93.853 ; 70.993,93.828 75.594,93.828 75.874,94.107 81.026,94.107 81.661,94.742 C23.2 83.036,94.742 83.185,94.891 83.185,95.878 83.334,96.027 R9.2 MD1.3
NetC24_2: C24.2 MD1.25 pad.21@65.786,110.109 R11.2 | length 51.7
  Top Layer w0.33: v1@67.613,114.476 70.485,117.348 v1(70.485,117.602) ; v1(82.296,101.641) 82.3,101.637 83.656,101.637 87.763,97.53 89.414,97.53 90.043,96.901 90.043,95.03 89.027,94.014 v1(89.027,92.583)
  Bottom Layer w0.305: v1(89.027,92.583) R11.2 90.656,94.092 90.805,94.241 C24.2
  Bottom Layer w0.33: pad.21@65.786,110.109 65.913,111.379 66.04,111.506 66.04,113.03 66.62,113.61 66.811,113.61 67.374,114.173 v1(67.564,114.173) ; v1(70.485,117.602) 70.485,115.57 70.635,115.42 70.635,114.15 76.32,108.465 76.32,103.208 76.514,103.014 77.842,103.014 77.846,103.014 81.318,102.978 81.415,102.881 81.649,102.647 81.649,102.577 82.296,101.93 v1(82.296,101.641)
NetD2_2: D2.2 L1.2 U2.1 | length 13.2
  Top Layer w0.381: U2.1 79.949,108.905 80.899,109.855 80.899,111.379 81.407,111.887 81.407,114.808 L1.2@82.296,115.697 ; L1.2@82.296,115.824 82.391,115.919 D2.2@86.106,115.919
NetMD1_6: MD1.6
NetMD1_12: MD1.12
NetMD1_13: MD1.13
NetMD1_23: MD1.23 pad.14@80.518,121.158 | length 20.3
  Top Layer w0.33: v1(71.436,111.379) 71.501,111.444 71.501,114.935 72.39,115.824 v1(72.39,119.507)
  Bottom Layer w0.279: MD1.23 69.503,111.379 v1(71.436,111.379)
  Bottom Layer w0.33: v1(72.39,119.507) 72.644,119.507 74.676,121.539 74.911,121.539 75.457,122.085 75.476,122.085 75.565,122.174 77.216,122.174 77.381,122.339 79.337,122.339 pad.14@80.518,121.158
NetMD1_24: MD1.24 R10.1 | length 2.4
  Bottom Layer w0.279: R10.1@67.183,112.522 67.198,112.537 69.355,112.537 MD1.24
NetMD1_26: MD1.26 R12.1 R13.2 | length 8.5
  Bottom Layer w0.305: MD1.26 71.755,116.713 72.756,117.714 R12.1 78.583,117.714 R13.2
NetPS1_10: PS1.10 R4.2 | length 1.5
  Top Layer w0.178: PS1.10@75.68,102.628 PS1.10@75.692,102.616 ; R4.2@75.68,104.101 R4.2@75.719,104.14
  Top Layer w0.3: PS1.10@75.68,102.628 R4.2@75.68,104.101
NetR5_2: R5.2 R6.1 U2.3 | length 11.6
  Top Layer w0.33: U2.3 77.492,110.805 77.343,110.656 77.343,107.098 77.492,106.949 R5.2 78.486,107.547 78.635,107.696 79.649,107.696 81.103,109.15 81.103,109.17 81.9,109.967 R6.1
RECT: C12.1 C13.1 C14.1 PS1.18 R1.2 | length 7.5
  Top Layer w0.3: R1.2@71.21,96.012 71.885,96.012 ; C12.1 71.885,98.447 ; C13.1@71.277,97.155 71.885,97.155 ; C14.1@71.374,94.996 71.628,94.996 71.885,95.253 71.885,96.012 ; 71.885,98.806 71.885,98.447 ; 71.885,98.837 72.113,99.065 73.223,99.065 PS1.18 ; 71.885,96.012 71.885,97.155 ; 71.885,97.155 71.885,98.447
RX: MD1.34 pad.20 | length 38.2
  Bottom Layer w0.279: pad.20 67.475,104.864 67.475,100.673 67.768,100.38 70.569,100.38 70.58,100.391
  Bottom Layer w0.305: 70.58,100.391 71.324,100.391 82.611,100.391 83.82,101.6 83.82,108.585 81.915,110.49 MD1.34
TX: MD1.35 pad.19 | length 38
  Bottom Layer w0.3: pad.19 66.054,104.902 66.639,104.317 66.673,104.317 66.942,104.049 66.942,100.444 67.564,99.822 69.849,99.822 69.872,99.845 71.098,99.845 82.838,99.845 84.366,101.374 84.366,110.707 83.185,111.888 MD1.35
pads on no net: MD1.4 MD1.5 MD1.7 MD1.8 MD1.9 MD1.10 MD1.11 MD1.14 MD1.16 MD1.17 MD1.18 MD1.19 MD1.20 MD1.21 MD1.22 MD1.27 MD1.28 MD1.29 MD1.30 MD1.31 MD1.32 MD1.33 MD1.36 MD1.37 PS1.7 PS1.8 PS1.11 PS1.13 U2.6 U3.2

## Polygon pours and split planes (outlines as drawn)
GND on Top Layer "GND_TOP" (solid, remove dead copper, pour order 20): 81.28,89.408 cw(c81.28,106.426) 64.262,106.426 cw(c81.28,106.426) 81.28,123.444 cw(c81.28,106.426) 98.298,106.426 cw(c81.28,106.426)
AC2 on Top Layer "AC2" (solid, pour order 12): 68.961,99.314 69.977,99.314 69.977,102.743 67.437,102.743 67.437,100.33 66.929,100.33 66.675,97.663 67.177,96.901 67.819,96.013 68.326,95.377 69.503,94.141 70.74,93.092 72.263,93.472 72.263,92.964 73.025,92.202 74.549,92.202 75.565,93.218 75.565,96.774 75.438,96.901 73.914,96.901 73.914,97.536 73.406,98.044 73.406,98.806 72.263,98.806 72.263,94.361 70.485,94.361 67.437,97.409 67.437,99.314
AC1 on Top Layer "COIL" (solid, pour order 15): 80.645,98.806 80.645,95.885 80.264,95.504 77.216,95.504 77.216,94.107 75.692,94.107 75.692,97.155 76.454,97.155 76.454,98.806 77.47,98.806 77.47,98.425 78.613,98.425 78.613,98.933 79.756,98.933 79.883,98.806
COIL_1 on Top Layer "AC1" (solid, remove dead copper, pour order 13): 77.343,95.123 79.756,95.123 79.756,92.456 79.502,92.202 77.343,92.202
GND on Top Layer "GND_1" (solid, pour order 16): 67.689,97.351 67.31,98.298 67.564,99.06 70.485,99.06 70.485,97.028 70.866,96.647 70.866,96.012 70.993,95.631 70.993,94.374 70.485,94.374
5V2 on Top Layer "5V2" (solid, pour order 17): 82.931,110.109 82.931,112.014 87.757,112.014 88.011,111.76 88.011,109.093 84.582,109.093 82.677,107.188 82.677,103.378 81.63,103.378 81.63,108.708
GND on Bottom Layer "GND_BOTTOM" (solid, remove dead copper, pour order 0): 81.28,89.408 cw(c81.28,106.426) 64.262,106.426 cw(c81.28,106.426) 81.28,123.444 cw(c81.28,106.426) 98.298,106.426 cw(c81.28,106.426)

## Other copper
Top Layer:
  rectangle net GND: 74.607,101.866 75.268,102.184
  pour cut-out: 77.343,98.425 77.343,98.298 77.343,98.162 77.851,98.162 77.851,98.425
  pour cut-out: 78.232,98.425 78.232,97.941 78.613,97.941 78.613,98.425
  pour cut-out: 72.644,108.204 71.12,108.204 70.993,108.331 70.993,108.585 72.644,108.585
  pour cut-out: 76.289,96.78 76.289,97.184 75.62,97.184 75.62,96.86
  pour cut-out: 70.358,100.457 69.85,100.457 69.85,100.711 69.85,100.838 70.358,100.838
  pour cut-out: 79.629,98.806 79.629,97.946 79.883,97.946 79.883,98.806
  pour cut-out: 82.804,111.252 85.09,111.252 85.09,112.141 82.931,112.141 82.804,112.014 82.804,111.379
  pour cut-out: 88.011,108.966 86.741,108.966 86.741,110.617 86.995,110.617 87.122,110.744 87.122,112.014 88.011,112.014
  region net BAT: 72.39,109.22 72.39,115.189 73.787,116.586 73.787,118.618 74.803,119.634 74.803,121.92 76.708,121.92 76.962,121.666 76.962,119.507 75.819,119.507 74.676,118.364 74.676,115.824 74.549,115.824 74.041,115.316 74.041,109.22
  pour cut-out: 75.074,95.029 75.067,95.022 75.067,94.722 76.32,94.722 76.305,94.737 76.305,95.047
  pour cut-out: 75.819,96.139 76.309,96.139 76.309,95.776 76.307,95.778 75.071,95.778 75.071,96.139
  pour cut-out: 80.518,106.68 79.121,106.68 79.121,107.315 79.629,107.315 81.534,109.22 81.788,109.22 81.788,109.474 82.296,109.982 82.296,110.109 83.312,110.109 83.312,109.347 83.185,109.347
  pour cut-out: 74.041,121.793 74.041,119.38 72.898,118.237 72.009,119.126 72.009,120.777
  pour cut-out: 70.358,111.252 69.977,110.871 64.897,110.871 64.897,113.03 69.469,117.602 69.469,118.618 69.596,118.618 70.993,120.015 72.136,118.872 72.136,115.316 71.12,114.3 71.12,112.903
  pour cut-out: 75.028,111.296 76.691,111.355 76.699,112.141 76.699,112.248 75.716,112.248 75.716,115.297 75.706,115.307 75.686,115.286 75.048,115.286 75.048,111.407 75.007,111.367
  pour cut-out: 84.074,116.332 85.09,116.332 85.051,116.371 85.051,117.424 84.08,117.424
  text "Top" at 70.866,130.048 h1.52
Bottom Layer:
  rectangle net GND: 76.674,103.378 82.423,108.839
  rectangle net 3V3: 85.852,94.996 88.011,97.155
  pour cut-out: 77.178,119.544 77.968,120.334 77.968,121.438 77.665,121.741 77.611,121.687 76.95,121.687 76.95,119.95 76.826,119.825 76.826,119.549
  pour cut-out: 85.848,94.146 85.845,94.142 85.103,94.142 85.103,94.397 85.186,94.48 85.558,94.48 85.7,94.622 85.907,94.622 85.907,94.194 85.848,94.135
  pour cut-out: 81.874,93.404 80.877,93.553 81.688,94.212 81.688,94.291 81.874,94.291 81.878,94.295
  pour cut-out: 77.627,100.777 77.634,100.771 77.68,100.817 79.811,100.817 79.811,101.012 79.27,101.553 78.664,101.553 78.11,102.107 78.084,102.081 77.627,102.081
  pour cut-out: 88.371,93.43 88.361,93.419 88.035,93.419 88.035,94.379 87.934,94.481 87.934,94.785 88.259,94.785 88.361,94.886 88.371,94.875
  pour cut-out: 89.662,94.361 90.424,94.361 90.424,94.869 90.354,94.939 90.334,94.939 90.334,95.825 90.354,96.044 89.672,96.044 89.672,94.379 89.651,94.358
  pour cut-out: 82.988,94.136 83.757,94.136 83.773,94.12 83.773,95.667 83.55,95.667 83.438,95.555 83.438,94.802 82.98,94.344
  pour cut-out: 64.274,101.866 65.532,103.124 65.532,107.442 64.135,107.442
  pour cut-out: 65.659,112.903 65.659,110.236 65.081,109.474 64.643,109.474 64.262,109.474 64.262,111.506
  pour cut-out: 68.453,112.268 68.453,110.617 68.326,110.49 67.818,110.49 67.818,112.268
  pour cut-out: 80.518,116.586 72.517,116.586 72.39,116.713 72.39,117.094 72.771,117.475 80.518,117.475

## Silkscreen, mask and mechanical layers (free items; w line width, h text height)
Top Overlay:
  text "BAT-" at 86.36,118.364 h1.02
  text "BAT+" at 71.374,117.856 h1.02

## Dimensions
98.298,106.426 to 64.262,106.426 on Top Layer